# Altium PCB Backplane.PcbDoc
Units mil, origin at the board's own origin, x right, y up, seen from the top; angles counter-clockwise.
Board outline 3937.01 x 9055.12 mil, 4 copper layers (Top Layer, Int1 (GND), Int2 (PWR), Bottom Layer), stack 60.709 mil thick; 33 components, 74 nets, 330 pads, 6 vias.
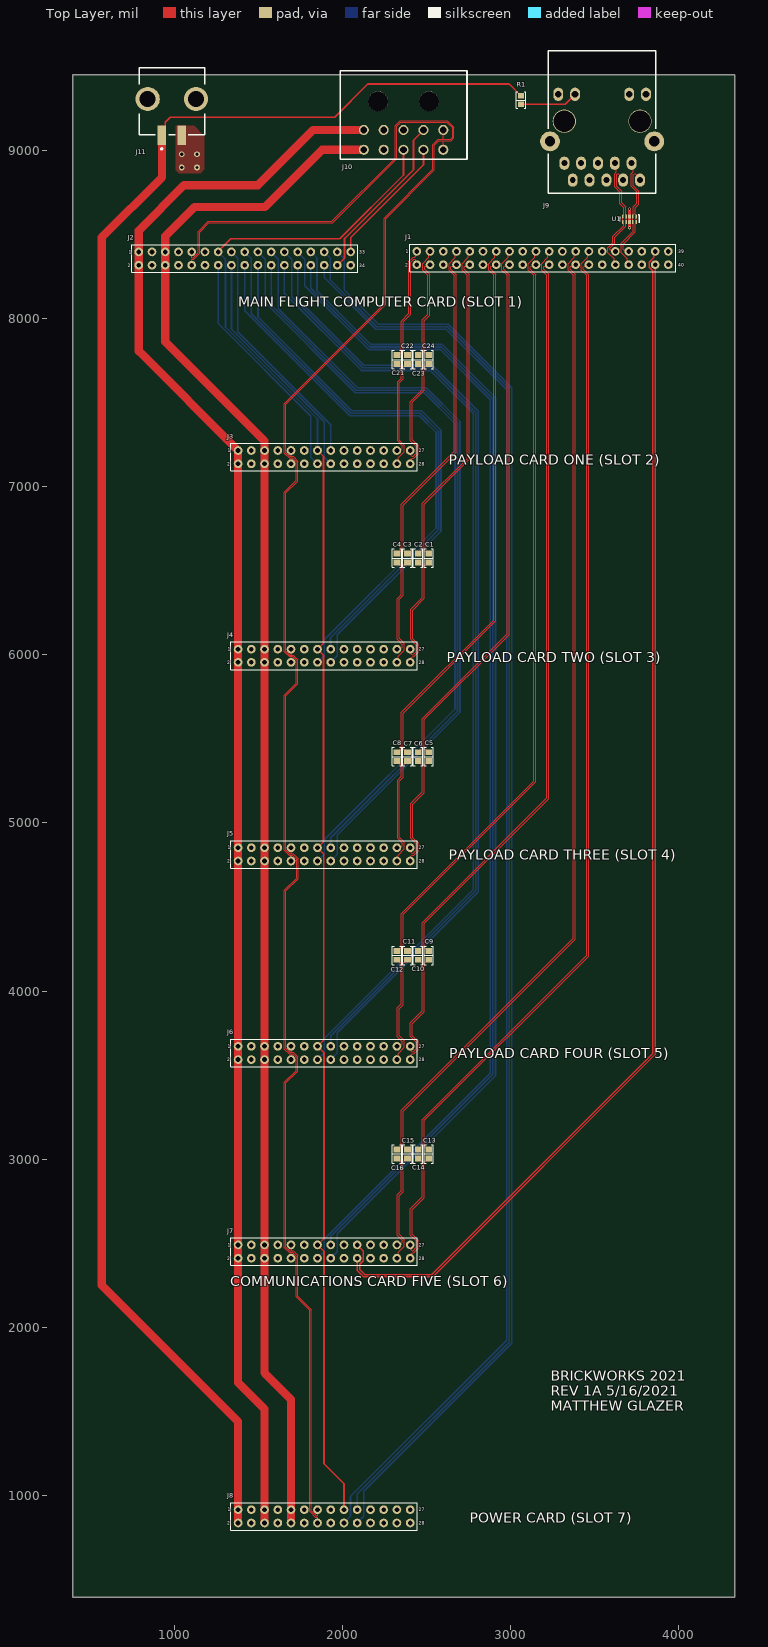
[diagram p0: Top Layer view]
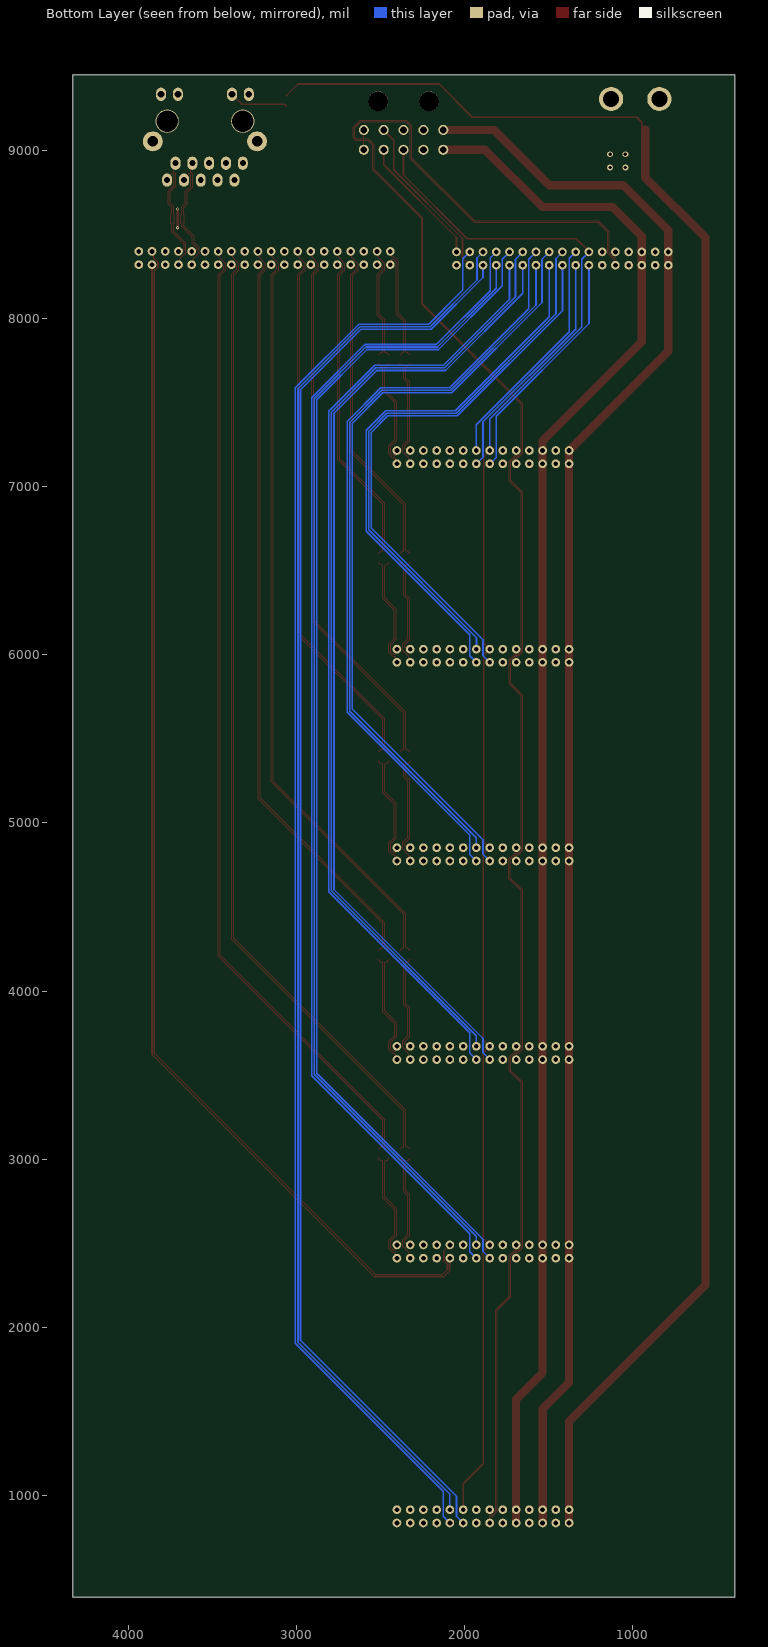
[diagram p1: Bottom Layer view, seen from below]
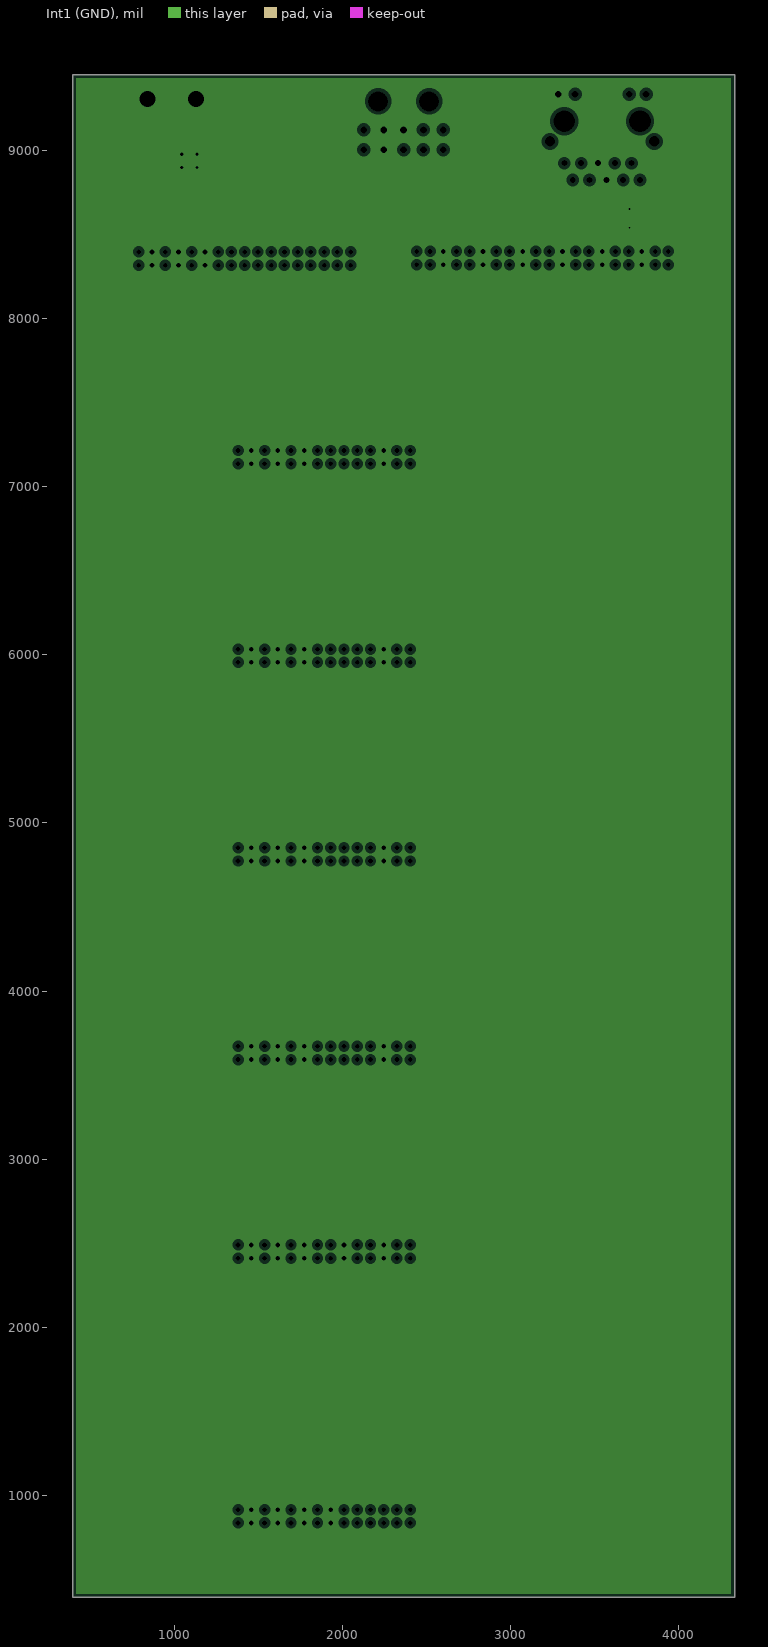
[diagram p2: Int1 (GND), clearances drawn from the general rule]
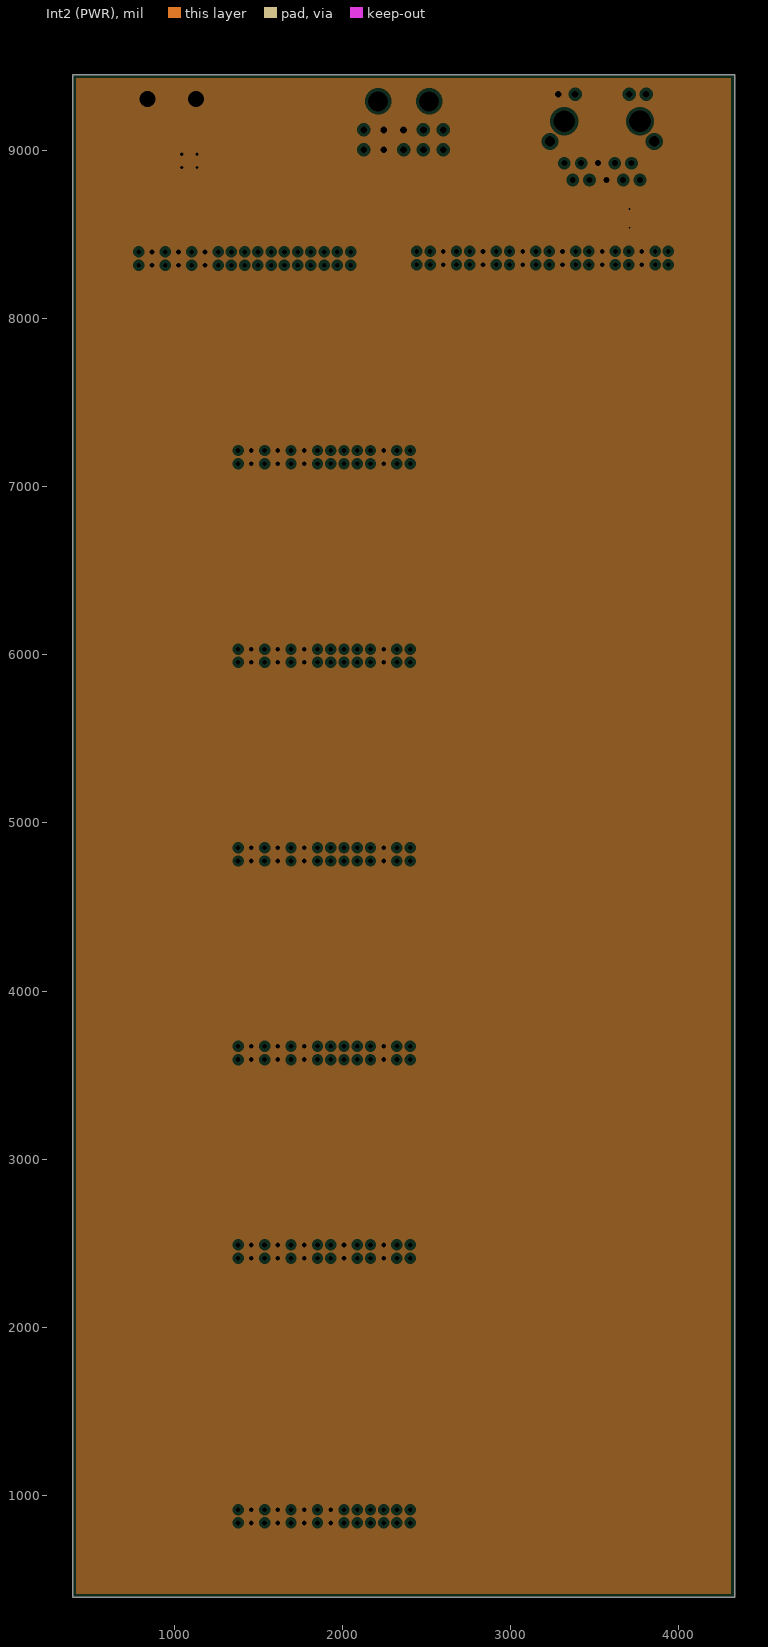
[diagram p3: Int2 (PWR), clearances drawn from the general rule]
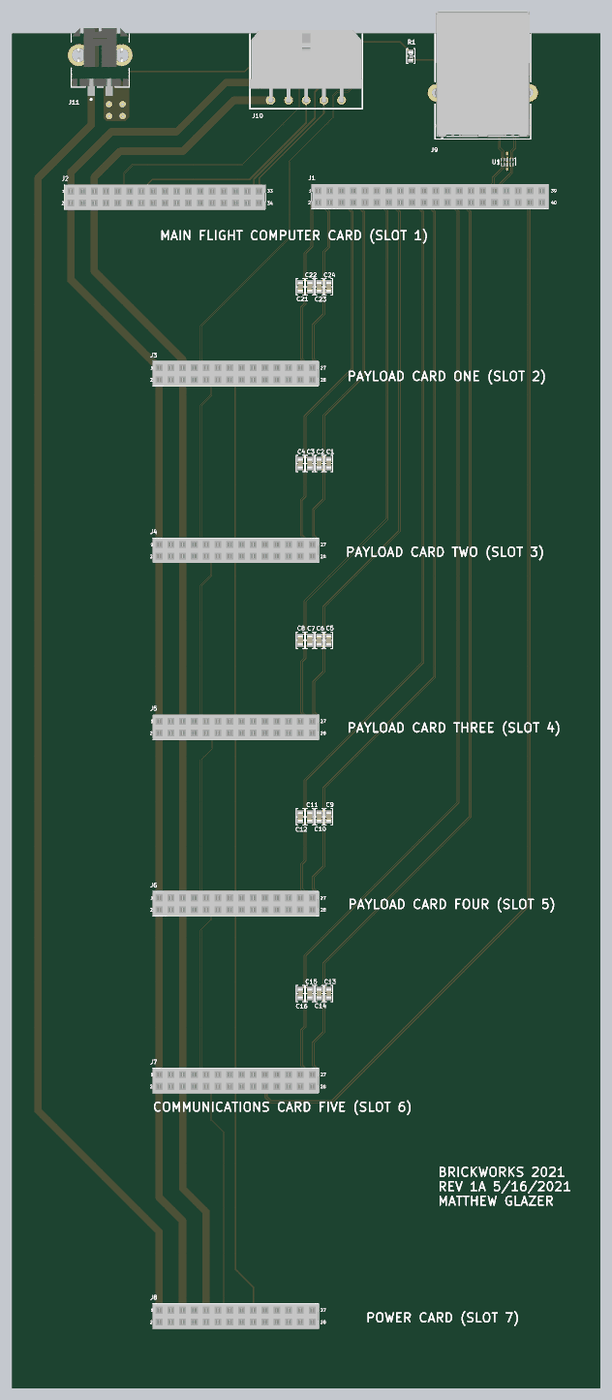
[diagram p4: 3D render of the assembled board from above, using the file's embedded part models]

## Layer stack, top to bottom
Top Solder: solder mask 0.3937, SM-001, Dk 4
Top Layer: signal copper 1.6142
Dielectric 1: prepreg 9.0551, PP-018, Dk 4.3
Int1 (GND): plane copper 1.378, net GND
Dielectric 3: core 36.6142, Core-028, Dk 4.3
Int2 (PWR): plane copper 1.378, net GND
Dielectric 5: prepreg 9.0551, PP-018, Dk 4.3
Bottom Layer: signal copper 1.6142
Bottom Solder: solder mask 0.3937, SM-001, Dk 4

## Board outline
393.7,393.7 393.7,9448.82 4330.71,9448.82 4330.71,393.7

## Design rules (kind name [scope] priority, off if disabled: settings)
Clearance [All] p1: gap=5 ignorepadtopadclearanceinfootprint=FALSE
DiffPairsRouting DiffPairsRouting120ohms [InDifferentialPairClass('DIFF120')] p1: maxlimit=5 minlimit=5 mostfreqgap=5 toplayer_minwidth=3.39 toplayer_maxwidth=3.39 toplayer_prefwidth=3.39 bottomlayer_minwidth=3.39 bottomlayer_maxwidth=3.39 bottomlayer_prefwidth=3.39 impedanceprofiledriven=TRUE impedanceprofileid={4BAA9A4F-C1FF-4DA5-899A-7868F848BEEB} impedanceprofilevalue=120.000000 maxuncoupledlength=500
DiffPairsRouting DiffPairsRouting90ohms [InDifferentialPairClass('DIFF90')] p2: maxlimit=5 minlimit=5 mostfreqgap=5 toplayer_minwidth=9.35 toplayer_maxwidth=9.35 toplayer_prefwidth=9.35 bottomlayer_minwidth=9.35 bottomlayer_maxwidth=9.35 bottomlayer_prefwidth=9.35 impedanceprofiledriven=TRUE impedanceprofileid={3F5B0224-8275-4148-A585-62029B990C27} impedanceprofilevalue=90.000000 maxuncoupledlength=500
DiffPairsRouting DiffPairsRouting100ohms [InDifferentialPairClass('DIFF100')] p3: maxlimit=5 minlimit=5 mostfreqgap=5 toplayer_minwidth=6.71 toplayer_maxwidth=6.71 toplayer_prefwidth=6.71 bottomlayer_minwidth=6.71 bottomlayer_maxwidth=6.71 bottomlayer_prefwidth=6.71 impedanceprofiledriven=TRUE impedanceprofileid={AE841F67-F670-4D4D-929D-F361617AC99B} impedanceprofilevalue=100.000000 maxuncoupledlength=500
HoleSize [All] p1: absolutevalues=TRUE maxlimit=201.57 minlimit=10 maxpercent=80.000 minpercent=20.000
MatchedLengths MatchLengths_J1_Passives_J7 [InxSignalClass('xSignals_J1_Passives_J7_MatchLengthsClass')] p1: tolerance=100 checknetsindiffpair=FALSE checkdiffpairvsdiffpair=TRUE checkxsignals=TRUE checkothers=TRUE
MatchedLengths MatchLengths_xSignals_J1_Passives_6 [InxSignalClass('xSignals_J1_Passives_MatchLengthsClass_6')] p2: tolerance=100 checknetsindiffpair=FALSE checkdiffpairvsdiffpair=TRUE checkxsignals=TRUE checkothers=TRUE
MatchedLengths MatchLengths_xSignals_J1_J7 [InxSignalClass('xSignals_J1_J7_MatchLengthsClass')] p3: tolerance=100 checknetsindiffpair=FALSE checkdiffpairvsdiffpair=TRUE checkxsignals=TRUE checkothers=TRUE
MatchedLengths MatchLengths_J1_Passives_J6 [InxSignalClass('xSignals_J1_Passives_J6_MatchLengthsClass')] p4: tolerance=100 checknetsindiffpair=FALSE checkdiffpairvsdiffpair=TRUE checkxsignals=TRUE checkothers=TRUE
MatchedLengths MatchLengths_xSignals_J1_Passives_5 [InxSignalClass('xSignals_J1_Passives_MatchLengthsClass_5')] p5: tolerance=100 checknetsindiffpair=FALSE checkdiffpairvsdiffpair=TRUE checkxsignals=TRUE checkothers=TRUE
MatchedLengths MatchLengths_xSignals_J1_J6 [InxSignalClass('xSignals_J1_J6_MatchLengthsClass')] p6: tolerance=100 checknetsindiffpair=FALSE checkdiffpairvsdiffpair=TRUE checkxsignals=TRUE checkothers=TRUE
MatchedLengths MatchLengths_J1_Passives_J5 [InxSignalClass('xSignals_J1_Passives_J5_MatchLengthsClass')] p7: tolerance=100 checknetsindiffpair=FALSE checkdiffpairvsdiffpair=TRUE checkxsignals=TRUE checkothers=TRUE
MatchedLengths MatchLengths_xSignals_J1_Passives_4 [InxSignalClass('xSignals_J1_Passives_MatchLengthsClass_4')] p8: tolerance=100 checknetsindiffpair=FALSE checkdiffpairvsdiffpair=TRUE checkxsignals=TRUE checkothers=TRUE
MatchedLengths MatchLengths_xSignals_J1_J5 [InxSignalClass('xSignals_J1_J5_MatchLengthsClass')] p9: tolerance=100 checknetsindiffpair=FALSE checkdiffpairvsdiffpair=TRUE checkxsignals=TRUE checkothers=TRUE
MatchedLengths MatchLengths_J1_Passives_J4 [InxSignalClass('xSignals_J1_Passives_J4_MatchLengthsClass')] p10: tolerance=100 checknetsindiffpair=FALSE checkdiffpairvsdiffpair=TRUE checkxsignals=TRUE checkothers=TRUE
MatchedLengths MatchLengths_xSignals_J1_Passives_3 [InxSignalClass('xSignals_J1_Passives_MatchLengthsClass_3')] p11: tolerance=100 checknetsindiffpair=FALSE checkdiffpairvsdiffpair=TRUE checkxsignals=TRUE checkothers=TRUE
MatchedLengths MatchLengths_xSignals_J1_J4 [InxSignalClass('xSignals_J1_J4_MatchLengthsClass')] p12: tolerance=100 checknetsindiffpair=FALSE checkdiffpairvsdiffpair=TRUE checkxsignals=TRUE checkothers=TRUE
MatchedLengths MatchLengths_J1_Passives_J3_2 [InxSignalClass('xSignals_J1_Passives_J3_MatchLengthsClass_2')] p13: tolerance=100 checknetsindiffpair=FALSE checkdiffpairvsdiffpair=TRUE checkxsignals=TRUE checkothers=TRUE
MatchedLengths MatchLengths_xSignals_J1_Passives_2 [InxSignalClass('xSignals_J1_Passives_MatchLengthsClass_2')] p14: tolerance=100 checknetsindiffpair=FALSE checkdiffpairvsdiffpair=TRUE checkxsignals=TRUE checkothers=TRUE
MatchedLengths MatchLengths_xSignals_J1_J3_2 [InxSignalClass('xSignals_J1_J3_MatchLengthsClass_1')] p15: tolerance=100 checknetsindiffpair=FALSE checkdiffpairvsdiffpair=TRUE checkxsignals=TRUE checkothers=TRUE
MatchedLengths MatchLengths_J1_Passives_J3_1 [InxSignalClass('xSignals_J1_Passives_J3_MatchLengthsClass_1')] p16: tolerance=100 checknetsindiffpair=FALSE checkdiffpairvsdiffpair=TRUE checkxsignals=TRUE checkothers=TRUE
MatchedLengths MatchLengths_xSignals_J1_Passives_1 [InxSignalClass('xSignals_J1_Passives_MatchLengthsClass_1')] p17: tolerance=100 checknetsindiffpair=FALSE checkdiffpairvsdiffpair=TRUE checkxsignals=TRUE checkothers=TRUE
MatchedLengths MatchLengths_J1_Passives_J3 [InxSignalClass('xSignals_J1_Passives_J3_MatchLengthsClass')] p18: tolerance=100 checknetsindiffpair=FALSE checkdiffpairvsdiffpair=TRUE checkxsignals=TRUE checkothers=TRUE
MatchedLengths MatchLengths_xSignals_J1_Passives [InxSignalClass('xSignals_J1_Passives_MatchLengthsClass')] p19: tolerance=100 checknetsindiffpair=FALSE checkdiffpairvsdiffpair=TRUE checkxsignals=TRUE checkothers=TRUE
MatchedLengths MatchLengths_xSignals_J1_J3_1 [InxSignalClass('xSignals_J1_J3_MatchLengthsClass')] p20: tolerance=100 checknetsindiffpair=FALSE checkdiffpairvsdiffpair=TRUE checkxsignals=TRUE checkothers=TRUE
MatchedLengths MatchLengths_xSignals_J1_J3 [InxSignalClass('xSignals_J1_J3_MatchLengthsClass')] p21: tolerance=100 checknetsindiffpair=FALSE checkdiffpairvsdiffpair=TRUE checkxsignals=TRUE checkothers=TRUE
MinimumAnnularRing [All] p1: minimumring=4
MinimumSolderMaskSliver [All] p1: minsoldermaskwidth=3
PlaneClearance [All] p1: clearance=20
PlaneConnect [All] p1: planeconnectstyle=Relief reliefexpansion=20 reliefentries=4 reliefconductorwidth=10 reliefairgap=10
PolygonConnect PolygonConnect_1 [All vs IsNamedPolygon('GND_L01_P002')] p1: connectstyle=Direct reliefconductorwidth=10 reliefentries=4 polygonreliefangle="90 Angle" airgapwidth=10
PolygonConnect [All] p2: connectstyle=Relief reliefconductorwidth=10 reliefentries=4 polygonreliefangle="90 Angle" airgapwidth=10
RoutingVias [All] p1: holewidth=20 width=35 viastyle="Through Hole" minholewidth=10 minwidth=18 maxholewidth=35 maxwidth=50
SilkToSilkClearance [All] p1: silktosilkclearance=5
SilkToSolderMaskClearance [IsPad] p1: minsilkscreentomaskgap=3 clearancetoexposedcopper=TRUE
SolderMaskExpansion [All] p1: expansion=4
Width [All] p1: maxlimit=49.21 minlimit=5 preferedwidth=10
23 further rules are at their usual default settings.

## Classes and differential pairs
differential pair class DIFF120: CAN
differential pair class DIFF100: ETH1_RX ETH1_TX ETH2_RX ETH2_TX ETH3_RX ETH3_TX ETH4_RX ETH4_TX ETH5_RX ETH5_TX ETH6_RX ETH6_TX P_ETH1_RX P_ETH1_TX P_ETH2_RX P_ETH2_TX P_ETH3_RX P_ETH3_TX P_ETH4_RX P_ETH4_TX P_ETH5_RX P_ETH5_TX P_ETH6_RX P_ETH6_TX S_ETH2_RX S_ETH2_TX S_ETH3_RX S_ETH3_TX S_ETH4_RX S_ETH4_TX S_ETH5_RX S_ETH5_TX S_ETH6_RX S_ETH6_TX
differential pair class DIFF90: USB1_D
differential pair S_ETH6_TX: +S_ETH6_TX_P -S_ETH6_TX_N
differential pair S_ETH6_RX: +S_ETH6_RX_P -S_ETH6_RX_N
differential pair S_ETH5_TX: +S_ETH5_TX_P -S_ETH5_TX_N
differential pair S_ETH5_RX: +S_ETH5_RX_P -S_ETH5_RX_N
differential pair S_ETH4_TX: +S_ETH4_TX_P -S_ETH4_TX_N
differential pair S_ETH4_RX: +S_ETH4_RX_P -S_ETH4_RX_N
differential pair S_ETH3_TX: +S_ETH3_TX_P -S_ETH3_TX_N
differential pair S_ETH3_RX: +S_ETH3_RX_P -S_ETH3_RX_N
differential pair P_ETH6_TX: +P_ETH6_TX_P -P_ETH6_TX_N
differential pair P_ETH6_RX: +P_ETH6_RX_P -P_ETH6_RX_N
differential pair P_ETH5_TX: +P_ETH5_TX_P -P_ETH5_TX_N
differential pair P_ETH5_RX: +P_ETH5_RX_P -P_ETH5_RX_N
differential pair P_ETH4_TX: +P_ETH4_TX_P -P_ETH4_TX_N
differential pair P_ETH4_RX: +P_ETH4_RX_P -P_ETH4_RX_N
differential pair P_ETH3_TX: +P_ETH3_TX_P -P_ETH3_TX_N
differential pair P_ETH3_RX: +P_ETH3_RX_P -P_ETH3_RX_N
differential pair P_ETH1_TX: +P_ETH1_TX_P -P_ETH1_TX_N
differential pair P_ETH1_RX: +P_ETH1_RX_P -P_ETH1_RX_N
differential pair S_ETH2_TX: +S_ETH2_TX_P -S_ETH2_TX_N
differential pair S_ETH2_RX: +S_ETH2_RX_P -S_ETH2_RX_N
differential pair P_ETH2_TX: +P_ETH2_TX_P -P_ETH2_TX_N
differential pair P_ETH2_RX: +P_ETH2_RX_P -P_ETH2_RX_N
differential pair CAN: +CAN_P -CAN_N
differential pair USB1_D: +USB1_D_P -USB1_D_N

## Components (designator, comment, footprint, x,y, rotation, side; value= is the part's Value field where it differs from the comment)
C1 "0.033µF" "CAP 0603_1608" 2511.81,6574.8 r90 top
C2 "0.033µF" "CAP 0603_1608" 2448.82,6574.8 r90 top
C3 "0.033µF" "CAP 0603_1608" 2385.83,6574.8 r90 top
C4 "0.033µF" "CAP 0603_1608" 2322.83,6574.8 r90 top
C5 "0.033µF" "CAP 0603_1608" 2511.81,5393.7 r90 top
C6 "0.033µF" "CAP 0603_1608" 2448.82,5393.7 r90 top
C7 "0.033µF" "CAP 0603_1608" 2385.83,5393.7 r90 top
C8 "0.033µF" "CAP 0603_1608" 2322.83,5393.7 r90 top
C9 "0.033µF" "CAP 0603_1608" 2511.81,4212.6 r90 top
C10 "0.033µF" "CAP 0603_1608" 2448.82,4212.6 r90 top
C11 "0.033µF" "CAP 0603_1608" 2385.83,4212.6 r90 top
C12 "0.033µF" "CAP 0603_1608" 2322.83,4212.6 r90 top
C13 "0.033µF" "CAP 0603_1608" 2511.81,3031.5 r90 top
C14 "0.033µF" "CAP 0603_1608" 2448.82,3031.5 r90 top
C15 "0.033µF" "CAP 0603_1608" 2385.83,3031.5 r90 top
C16 "0.033µF" "CAP 0603_1608" 2322.83,3031.5 r90 top
C21 "0.033µF" "CAP 0603_1608" 2322.83,7755.91 r90 top
C22 "0.033µF" "CAP 0603_1608" 2385.83,7755.91 r90 top
C23 "0.033µF" "CAP 0603_1608" 2448.82,7755.91 r90 top
C24 "0.033µF" "CAP 0603_1608" 2511.81,7755.91 r90 top
J1 "0791077019" 0791077019 2440.94,8398.74 r0 top
J2 "0791077016" 0791077016 787.4,8395.67 r0 top
J3 "0791077013" 0791077013 1377.95,7214.57 r0 top
J4 "0791077013" 0791077013 1377.95,6033.46 r0 top
J5 "0791077013" 0791077013 1377.95,4852.36 r0 top
J6 "0791077013" 0791077013 1377.95,3671.26 r0 top
J7 "0791077013" 0791077013 1377.95,2490.16 r0 top
J8 "0791077013" 0791077013 1377.95,915.35 r0 top
J9 "SCH - CONNECTOR - ETHERNET - ABRACON ARJM11" "PCB - CONNECTOR - MODULAR - ETHERNET - ABRACON ARJM11" 3543.31,9173.23 r180 top
J10 "SCH - CONNECTOR - RECTANGULAR - MOLEX 0430451000" "PCB - CONNECTOR - RECTANGULAR - MOLEX 0430451000" 2362.2,9291.34 r180 top
J11 "436500210" FP-436500210-MFG 984.25,9291.34 r180 top
R1 "1 kOhms" "RES 0603_1608" 3061.02,9299.21 r90 top
U1 "TPD4S010DQAR" DQA0010A_V 3706,8590 r270 top

## Footprints (in the part's own frame and the unit in brackets; to place one, negate y for a bottom-side part, rotate by r counter-clockwise, add the part's x,y. Pads: shape width x height; smd on the part's side, far side on the other; paste and mask are expansions set on the pad)
0791077013 [mm] "28 pin milli-grid receptacle, vertical"
  round 1.31 hole 0.71: 1(0,0) 2(0,-2) 3(2,0) 4(2,-2) 5(4,0) 6(4,-2) 7(6,0) 8(6,-2) 9(8,0) 10(8,-2) 11(10,0) 12(10,-2) 13(12,0) 14(12,-2) 15(14,0) 16(14,-2) 17(16,0) 18(16,-2) 19(18,0) 20(18,-2) 21(20,0) 22(20,-2) 23(22,0) 24(22,-2) 25(24,0) 26(24,-2) 27(26,0) 28(26,-2)
  silkscreen extent -1.09,-3.09 27.09,1.09, body extent -1.09,-3.09 27.1,1.1, height 4.47
0791077016 [mm] "34 pin milli-grid receptacle, vertical"
  round 1.31 hole 0.71: 1(0,0) 2(0,-2) 3(2,0) 4(2,-2) 5(4,0) 6(4,-2) 7(6,0) 8(6,-2) 9(8,0) 10(8,-2) 11(10,0) 12(10,-2) 13(12,0) 14(12,-2) 15(14,0) 16(14,-2) 17(16,0) 18(16,-2) 19(18,0) 20(18,-2) 21(20,0) 22(20,-2) 23(22,0) 24(22,-2) 25(24,0) 26(24,-2) 27(26,0) 28(26,-2) 29(28,0) 30(28,-2) 31(30,0) 32(30,-2) 33(32,0) 34(32,-2)
  silkscreen extent -1.09,-3.09 33.09,1.09, body extent -1.09,-3.09 33.1,1.1, height 4.47
0791077019 [mm] "40 pin milli-grid receptacle, vertical"
  round 1.31 hole 0.71: 1(0,0) 2(0,-2) 3(2,0) 4(2,-2) 5(4,0) 6(4,-2) 7(6,0) 8(6,-2) 9(8,0) 10(8,-2) 11(10,0) 12(10,-2) 13(12,0) 14(12,-2) 15(14,0) 16(14,-2) 17(16,0) 18(16,-2) 19(18,0) 20(18,-2) 21(20,0) 22(20,-2) 23(22,0) 24(22,-2) 25(24,0) 26(24,-2) 27(26,0) 28(26,-2) 29(28,0) 30(28,-2) 31(30,0) 32(30,-2) 33(32,0) 34(32,-2) 35(34,0) 36(34,-2) 37(36,0) 38(36,-2) 39(38,0) 40(38,-2)
  silkscreen extent -1.09,-3.09 39.09,1.09, body extent -1.1,-3.1 39.09,1.09, height 4.47
"CAP 0603_1608" [mm] "Chip Capacitor, 2-Leads, Body 1.60x0.80mm, IPC Medium Density"
  rect 0.9x1 smd: 1(-0.675,0) 2(0.675,0)
  silkscreen extent -1.4,-0.7 1.4,0.7, body extent -0.8,-0.41 0.8,0.41, height 0.82
DQA0010A_V [mm] "SON, 10-Leads, Body 1x2.5mm, Pitch 0.5mm, TI Recommended"
  rrect50% 0.565x0.2 smd: 1(-0.417,1) 2(-0.417,0.5) 4(-0.417,-0.5) 5(-0.417,-1) 6(0.417,-1) 7(0.417,-0.5) 9(0.417,0.5) 10(0.417,1)
  rrect28% 0.565x0.36 on Top Paste: 3(-0.417,0) 8(0.417,0)
  rrect25% 0.565x0.4 smd paste-0.2: 3(-0.417,0) 8(0.417,0)
  silkscreen extent -0.67,-1.45 0.55,1.45, body extent -0.55,-1.3 0.55,1.3, height 0.56
FP-436500210-MFG [mm]
  rect 1.27x2.92 smd paste+0 mask+0: 1(1.5,5.12) 2(-1.5,5.12)
  round 3.66 hole 2.41 paste-1000 mask+0: 3(-3.65,-0.35) 4(3.65,-0.35)
  silkscreen extent -4.95,-5.07 4.95,7.3, body extent -5.58,-5.18 5.58,6.68, height 0.25
"PCB - CONNECTOR - MODULAR - ETHERNET - ABRACON ARJM11" [mm]
  oval 1.5x2 hole 0.9: 1(-5.715,8.89) 2(-4.445,6.35) 3(-3.175,8.89) 4(-1.905,6.35) 5(-0.635,8.89) 6(0.635,6.35) 7(1.905,8.89) 8(3.175,6.35) 9(4.445,8.89) 10(5.715,6.35)
  oval 1.5x2 hole 1.02: 11(-6.63,-4.06) 12(-4.09,-4.06) 13(4.09,-4.06) 14(6.63,-4.06)
  round 3.5 hole 3.25: M(-5.715,0) M(5.715,0)
  round 3 hole 1.57: S(-7.875,3.05) S(7.875,3.05)
  silkscreen extent -8.13,-10.67 8.13,10.92, body extent -8.1,-10.75 8.1,10.85, height 13.2
"PCB - CONNECTOR - RECTANGULAR - MOLEX 0430451000" [mm]
  round 1.524 hole 1.02: 1(6,4.32) 2(3,4.32) 3(0,4.32) 4(-3,4.32) 5(-6,4.32) 6(6,7.32) 7(3,7.32) 8(0,7.32) 9(-3,7.32) 10(-6,7.32)
  round 3 hole 3: M(-3.85,0) M(3.85,0)
  silkscreen extent -9.57,-4.6 9.58,8.76, body extent -9.57,-4.6 9.58,7.64, height 8.83
"RES 0603_1608" [mm] "Chip Resistor, 2-Leads, Body 1.60x0.80mm, IPC Medium Density"
  rect 0.85x0.95 smd: 1(-0.65,0) 2(0.65,0)
  silkscreen extent -1.27,-0.7 1.27,0.7, body extent -0.8,-0.4 0.8,0.4, height 0.45

## Part data
C1 C2 C3 C4 C5 C6 C7 C8 C9 C10 C11 C12 C13 C14 C15 C16 C21 C22 C23 C24: library part CL10B333KB8NFNC, "CAP CER 0.033UF 50V X7R 0603", Device Package="0603 (1608 Metric)", Manufacturer="Samsung Electro-Mechanics", Operating Temperature="-55°C ~ 125°C", Supplier Part Number 1=1276-2040-1-ND, Temperature Coefficient=X7R, Tolerance=±10%, Applications="General Purpose", Capacitance=0.033µF, ComponentLink1Description=Datasheet, ComponentLink1URL=http://www.samsungsem.com/kr/support/product-search/mlcc/CL10B333KB8NFNC.jsp, ComponentLink2Description="DigiKey Link", ComponentLink2URL=http://digikey.com/product-detail/en/samsung-electro-mechanics/CL10B333KB8NFNC/1276-2040-1-ND/3890126, LastUpdated="8/13/2020 10:21:44 AM", Lifecycle Status=Active, Minimum Order=1, Mounting Type="Surface Mount, MLCC", Package / Case="0603 (1608 Metric)", Packaging=TapeAndReel, PartId=14254, Part Number=CL10B333KB8NFNC, Part Status=Active, Price=0.01, Series=CL, Size / Dimension="0.063\" L x 0.031\" W (1.60mm x 0.80mm)", Supplier 1=DigiKey, Thickness (Max)="0.035\" (0.90mm)"
J1: Supplier Part Number 1=WM18685-ND, Supplier 1=Digi-Key
J2: Supplier Part Number 1=WM4228-ND, Supplier 1=Digi-Key
J3 J4 J5 J6 J7 J8: Supplier Part Number 1=23-0791077013-ND, Supplier 1=Digi-Key
J9: Supplier Part Number 1=535-14133-1-ND, Supplier 1=Digi-Key
J10: Supplier Part Number 1=WM1817-ND, Supplier 1=Digi-Key
J11: library part CMP-04776-000082-1, "CONN HEADER SMD R/A 2POS 3MM", Current Rating=8.5A, Manufacturer=Molex, Temperature="-40°C to +105°C", Temperature Range High=+105°C, Temperature Range Low=-40°C, Voltage Rating=600V, Automotive=No, Category=Conn, ComponentLink2Description=Datasheet, ComponentLink2URL=https://www.molex.com/webdocs/datasheets/pdf/en-us/0436500210_PCB_HEADERS.pdf, Conn Gender=Male, Conn Orientation="Right Angle", Contact Material=Gold,Nickel, Device Class L1=Connectors, Device Class L2="Headers and Wire Housings", Device Class L3=unset, Digikey Description="CONN HEADER SMD R/A 2POS 3MM", Footprint Url=https://www.molex.com/pdm_docs/sd/436500210_sd.pdf, Height=6.07mm, Lead Free=Yes, Manufacturer Part Number=436500210, Mouser Description="Conn Power HDR 2 POS 3mm Solder RA SMD 2 Terminal 1 Port Embossed T/R", Number of Contacts=2, Number of Rows=1, Octopart=https://octopart.com/43650-0210-molex-298097, Package=436500210, Pitch=3mm, RoHS=TRUE
R1: library part RNCP0603FTD1K00, "RES 1K OHM 1% 1/8W 0603", Device Package="0603 (1608 Metric)", Manufacturer="Stackpole Electronics Inc", Operating Temperature="-55°C ~ 155°C", Power (Watts)="0.125W, 1/8W", Supplier Device Package=0603, Supplier Part Number 1=RNCP0603FTD1K00CT-ND, Temperature Coefficient=±100ppm/°C, Tolerance=±1%, ComponentLink1Description=Datasheet, ComponentLink1URL=https://www.seielect.com/catalog/sei-rncp.pdf, ComponentLink2Description="DigiKey Link", ComponentLink2URL=http://digikey.com/product-detail/en/stackpole-electronics-inc/RNCP0603FTD1K00/RNCP0603FTD1K00CT-ND/2240445, Composition="Thin Film", Features="Anti-Sulfur, Moisture Resistant", Height - Seated (Max)="0.020\" (0.50mm)", LastUpdated="9/2/2020 1:10:23 AM", Lifecycle Status=Active, Minimum Order=1, Number of Terminations=2, Package / Case="0603 (1608 Metric)", Packaging=TapeAndReel, PartId=5694, Part Number=RNCP0603FTD1K00, Part Status=Active, Price=0.01, Resistance="1 kOhms", Series=RNCP, Size / Dimension="0.059\" L x 0.031\" W (1.50mm x 0.80mm)", Supplier 1=DigiKey
U1: library part CMP-0326-00026-3, "ESD Solution for High-Speed Differential Interface, 4 Channels, -40 to +85 degC,10-pin SON (DQA), Green (RoHS & no Sb/Br)", Breakdown Voltage(Min)(V)=9, Differential Capacitance(pF)=0.05, IO Capacitance(Typ)(pF)=0.8, IO Leakage Current(nA)=10, Manufacturer="Texas Instruments", 1394 / Firewire=TRUE, ComponentLink1Description="Manufacturer URL", ComponentLink1URL=http://www.ti.com/, ComponentLink2Description=Datasheet, ComponentLink2URL=http://www.ti.com/general/docs/lit/getliterature.tsp?genericPartNumber=TPD4S010&fileType=pdf, ComponentLink3Description="URL Link1", ComponentLink3URL=SamplesURL:http://www.ti.com/product/tpd4s010#samples, DatasheetVersion=SLVS817E, Eco-Plan="Green (RoHS & no Sb/Br)", IEC 61000-4-2 Air-Gap(+/- kV)=9, IEC 61000-4-2 Contact(+/- kV)=8, Mounting Technology="Surface Mount", PackageDescription="10-Pin Plastic Small Outline No-Lead, 1 x 2.5 x 0.55 mm Body, 0.5 mm Pitch", PackageReference=DQA0010A, PackageVersion="revB, Sep-2009", PartNumber=TPD4S010DQAR, Serial ATA / eSATA=TRUE, SubFamily="ESD Solution"

## Via types
v1: diameter 35, hole 20, Top Layer to Bottom Layer, 4 vias
v2: diameter 18, hole 10, Top Layer to Bottom Layer, 2 vias

## Nets (pads, with @x,y where several pads share a name; then routed paths per layer and width w, separated by ;. In a path a pad name is that pad's centre, name@x,y a point inside that pad or via, vN(x,y) a via of type N, cw(c..) or ccw(c..) an arc to the next point about the centre after c; other vN are vias at no path point)
CAN_N: J2.10 J3.10 J4.10 J5.10 J6.10 J7.10 J8.14 J10.5 | length 11488.2
  Top Layer w3.39: J2.10 1102.36,8350.11 1104.35,8352.1 1114.33,8352.1 1148.62,8386.39 1148.62,8512.75 1204.87,8569 1940,8569 2321,8950 2321,9142 2346,9167 2620,9167 2653.61,9133.39 2653.61,9077.48 2642.53,9066.4 2600.41,9066.4 2598.43,9068.39 ; J7.10 1692.91,2444.6 ; J6.10 1692.91,3625.7 ; J5.10 1692.91,4806.81 ; J4.10 1692.91,5987.91 ; J3.10 1692.91,7169.01 ; J8.14 1850.39,869.8 1848.41,871.79 1838.42,871.79 1804.14,906.07 1804.14,2101.86 1723.79,2182.21 1723.79,2424.21 1701.41,2446.59 1694.9,2446.59 1692.91,2444.6 ; J10.5 2598.43,9068.39 ; 1692.91,2444.6 1690.93,2446.59 1680.94,2446.59 1653.64,2473.89 1653.64,3456.64 1723.79,3526.79 1723.79,3605.31 1701.41,3627.69 1694.9,3627.69 1692.91,3625.7 ; 1692.91,3625.7 1690.93,3627.69 1680.94,3627.69 1653.64,3654.99 1653.64,4598.51 1727.06,4671.94 1727.06,4783.14 1701.41,4808.8 1694.9,4808.8 1692.91,4806.81 ; 1692.91,4806.81 1690.93,4808.8 1680.94,4808.8 1653.64,4836.1 1653.64,5760.51 1723.79,5830.66 1723.79,5967.51 1701.41,5989.9 1694.9,5989.9 1692.91,5987.91 ; 1692.91,5987.91 1690.93,5989.9 1680.94,5989.9 1653.64,6017.2 1653.64,6966.51 1723.79,7036.66 1723.79,7148.62 1701.41,7171 1694.9,7171 1692.91,7169.01 ; 1692.91,7169.01 1690.93,7171 1680.94,7171 1653.64,7198.3 1653.64,7494.04 2247,8087.39 2247,8597 2537,8887 2537,9034 2569.4,9066.4 2596.44,9066.4 2598.43,9068.39
CAN_P: J2.9 J3.9 J4.9 J5.9 J6.9 J7.9 J8.13 J10.10 | length 11488.2
  Top Layer w3.39: J2.9 1102.36,8362.48 1104.35,8360.5 1110.86,8360.5 1140.22,8389.86 1140.22,8516.22 1201.39,8577.39 1936.52,8577.39 2312.61,8953.48 2312.61,9145.48 2342.52,9175.39 2623.48,9175.39 2662,9136.87 2662,9074 2646.01,9058.01 2600.41,9058.01 2598.43,9056.02 ; J7.9 1692.91,2456.97 ; J6.9 1692.91,3638.07 ; J5.9 1692.91,4819.18 ; J4.9 1692.91,6000.28 ; J3.9 1692.91,7181.38 ; J8.13 1850.39,882.17 1848.41,880.18 1841.9,880.18 1812.53,909.55 1812.53,2105.34 1732.19,2185.69 1732.19,2427.68 1704.88,2454.98 1694.9,2454.98 1692.91,2456.97 ; J10.10 2598.43,9056.02 ; 1692.91,2456.97 1690.93,2454.98 1684.42,2454.98 1662.04,2477.37 1662.04,3453.16 1732.19,3523.31 1732.19,3608.79 1704.88,3636.09 1694.9,3636.09 1692.91,3638.07 ; 1692.91,3638.07 1690.93,3636.09 1684.42,3636.09 1662.04,3658.47 1662.04,4595.04 1735.46,4668.46 1735.46,4786.62 1704.88,4817.19 1694.9,4817.19 1692.91,4819.18 ; 1692.91,4819.18 1690.93,4817.19 1684.42,4817.19 1662.04,4839.57 1662.04,5757.04 1732.19,5827.19 1732.19,5970.99 1704.88,5998.29 1694.9,5998.29 1692.91,6000.28 ; 1692.91,6000.28 1690.93,5998.29 1684.42,5998.29 1662.04,6020.67 1662.04,6963.04 1732.19,7033.19 1732.19,7152.09 1704.88,7179.39 1694.9,7179.39 1692.91,7181.38 ; 1692.91,7181.38 1690.93,7179.39 1684.42,7179.39 1662.04,7201.78 1662.04,7490.56 2255.39,8083.92 2255.39,8593.52 2545.39,8883.52 2545.39,9030.52 2572.88,9058.01 2596.44,9058.01 2598.43,9056.02
GND: J1.5 J1.6 J1.11 J1.12 J1.17 J1.18 J1.23 J1.24 J1.29 J1.30 J1.35 J1.36 J2.3 J2.4 J2.7 J2.8 J2.11 J2.12 J3.3 J3.4 J3.7 J3.8 J3.11 J3.12 J3.23 J3.24 J4.3 J4.4 J4.7 J4.8 J4.11 J4.12 J4.23 J4.24 J5.3 J5.4 J5.7 J5.8 J5.11 J5.12 J5.23 J5.24 J6.3 J6.4 J6.7 J6.8 J6.11 J6.12 J6.23 J6.24 J7.3 J7.4 J7.7 J7.8 J7.11 J7.12 J7.17 J7.18 J7.23 J7.24 J8.3 J8.4 J8.7 J8.8 J8.11 J8.12 J8.15 J8.16 J9.5 J9.6 J9.14 J10.2 J10.3 J10.7 J11.2 J11.3 J11.4 U1.3@3706,8606.44 U1.8@3706,8573.56 | length 111.7
  Top Layer w9.35: v2(3705.5,8539.5) v2@3705.5,8541.5 ; v2@3705.5,8650.5 v2(3706,8651)
  Top Layer w15.75: v2@3705.5,8541.5 v2@3705.5,8650.5
  other v1: 1043.31,8897.64 1133.86,8897.64 1043.31,8976.38 1133.86,8976.38
NetJ2_1: J2.1 J2.2 J3.1 J3.2 J4.1 J4.2 J5.1 J5.2 J6.1 J6.2 J7.1 J7.2 J8.5 J8.6 J10.1 | length 9582.9
  Top Layer w39.37: J8.6@1535,837.05 J8.6
  Top Layer w49.21: J8.6@1535,837.05 1535,1514 1377.95,1671.05 J7.2 J7.1 J6.2 J6.1 J5.2 J5.1 J4.2 J4.1 J3.2 J3.1 787.4,7805.12 J2.2 J2.1 787.4,8523.4 1057,8793 1496,8793 1824.26,9121.26 J10.1
NetJ2_5: J2.5 J2.6 J3.5 J3.6 J4.5 J4.6 J5.5 J5.6 J6.5 J6.6 J7.5 J7.6 J8.9 J8.10 J10.6 | length 9356.2
  Top Layer w49.21: J8.10 J8.9 1692.91,1572.09 1535.43,1729.57 J7.6 J7.5 J6.6 J6.5 J5.6 J5.5 J4.6 J4.5 J3.6 J3.5 1535.43,7271.57 944.88,7862.12 J2.6 J2.5 944.88,8488.88 1119,8663 1537,8663 1877.15,9003.15 J10.6
NetJ2_13: J2.13 J3.13 J4.13 J5.13 J6.13 J7.13 J8.17 J10.8 | length 9356.3
  Top Layer w10: J2.13 1259.84,8398.84 1335,8474 1983,8474 2362.2,8853.2 J10.8 ; J3.13 1886.18,7178.78 1886.18,6069.25 J4.13 1886.18,5997.68 1886.18,4888.15 J5.13 1888,4814.76 1888,3708.87 J6.13 1889,3632.65 1889,2528.76 J7.13 1889,2451.55 1889,1189 2007.87,1070.13 J8.17
  Bottom Layer w10: J2.13 1302.8,8352.72 1302.8,7949.2 1850.39,7401.61 J3.13
NetJ2_14: J2.14 J3.14 | length 1427
  Bottom Layer w10: J2.14 1259.84,7970.16 1811,7419 1811,7173 1848.17,7135.83 J3.14
NetJ2_15: J2.15 J3.15 | length 1425.7
  Bottom Layer w10: J2.15 1376,8358.25 1376,7921 1929.13,7367.87 J3.15
NetJ2_16: J2.16 J3.16 | length 1425.7
  Bottom Layer w10: J2.16 1338.58,7936.42 1889.59,7385.41 1889.59,7175.37 J3.16
NetJ2_17: J2.17 J4.15 | length 3348.2
  Bottom Layer w10: J2.17 1456,8356.99 1456,8028.79 2048.79,7436 2462.21,7436 2570,7328.21 2570,6744 1928,6102 1928,6034.6 J4.15
NetJ2_18: J2.18 J4.14 | length 3367.5
  Bottom Layer w10: J2.18 1417.32,8046.25 2042.57,7421 2456,7421 2555,7322 2555,6754 1890,6089 1890,5994.33 J4.14
NetJ2_19: J2.19 J5.14 | length 4686
  Bottom Layer w10: J2.19 1539.02,8352.72 1539.02,8094.56 2075.57,7558 2485,7558 2668,7375 2668,5677 1890,4899 1890,4813.23 J5.14
NetJ2_20: J2.20 J4.16 | length 3327.1
  Bottom Layer w10: J2.20 1496.06,8009.94 2055,7451 2468.43,7451 2585,7334.43 2585,6735 1968,6118 1968,5993.59 J4.16
NetJ2_21: J2.21 J5.16 | length 4645.6
  Bottom Layer w10: J2.21 1617.76,8352.72 1617.76,8058.24 2088,7588 2497.43,7588 2698,7387.43 2698,5658 1968,4928 1968,4812.49 J5.16
NetJ2_22: J2.22 J5.15 | length 4475.7
  Bottom Layer w10: J2.22 1574.8,8079.98 2081.79,7573 2491.21,7573 2683,7381.21 2683,5665 1929.13,4911.13 J5.15
NetJ2_23: J2.23 J6.15 | length 5792.6
  Bottom Layer w10: J2.23 1696.5,8352.72 1696.5,8128.29 2118.79,7706 2527.21,7706 2792,7441.21 2792,4598 1929.13,3735.13 J6.15
NetJ2_24: J2.24 J6.14 | length 5812
  Bottom Layer w10: J2.24 1653.54,8150.03 2112.57,7691 2521,7691 2776,7436 2776,4604 1890,3718 1890,3632.13 J6.14
NetJ2_25: J2.25 J7.14 | length 7133.7
  Bottom Layer w10: J2.25 1775.24,8352.72 1775.24,8194.34 2154.57,7815 2580,7815 2878,7517 2878,3512 1890,2524 1890,2451.02 J7.14
NetJ2_26: J2.26 J6.16 | length 5772.4
  Bottom Layer w10: J2.26 1732.28,8113.72 2125,7721 2533.43,7721 2807,7447.43 2807,4590 1968,3751 1968,3631.39 J6.16
NetJ2_27: J2.27 J7.16 | length 7094.1
  Bottom Layer w10: J2.27 1847,8359.69 1847,8165 2167,7845 2592.43,7845 2909,7528.43 2909,3497 1968,2556 1968,2450.28 J7.16
NetJ2_28: J2.28 J7.15 | length 6923.4
  Bottom Layer w10: J2.28 1811.02,8179.76 2160.79,7830 2586.21,7830 2893,7523.21 2893,3505 1929.13,2541.13 J7.15
NetJ2_29: J2.29 J8.19 | length 8555.1
  Bottom Layer w10: J2.29 1925.55,8359.88 1925.55,8228.66 2203.21,7951 2621.21,7951 2990,7582.21 2990,1912 2086.61,1008.61 J8.19
NetJ2_30: J2.30 J8.18 | length 8575.3
  Bottom Layer w10: J2.30 1889.76,8243.24 2197,7936 2615,7936 2975,7576 2975,1924 2047,996 2047,875.74 J8.18
NetJ2_31: J2.31 J8.20 | length 8612.4
  Bottom Layer w10: J2.31 2009.73,8354.44 2009.73,8169.27 2213,7966 2627.43,7966 3006,7587.43 3006,1905 2126,1025 2126,876 J8.20
NetJ2_32: J2.32 J10.4 | length 1016.3
  Top Layer w10: J2.32 2011.46,8359.88 2011.46,8475.46 2421,8885 2421,9060 2480.31,9119.31 J10.4
NetJ2_33: J2.33 J10.9 | length 786.9
  Top Layer w10: J2.33 2047.24,8481.73 2480.31,8914.81 J10.9
NetJ8_1: J8.1 J8.2 J11.1 R1.2 | length 11053.7
  Top Layer w10: J11.1@925.2,9122.24 945.2,9142.24 945.2,9167.2 975,9197 1953,9197 2150,9394 2990,9394 R1.2@3058,9326
  Top Layer w49.21: J11.1@925.2,9122.24 J11.1 925.2,8839.2 567,8481 567,2251 1378,1440 J8.2@1378,841
NetJ9_13: J9.13 R1.1 | length 351.6
  Top Layer w10: R1.1@3058.98,9261.76 R1.1@3070.71,9273.49 ; R1.1@3071.73,9274 3323.21,9274 J9.13
P_ETH1_RX_N: J1.32 J9.4 U1.5 U1.6 | length 694
  Top Layer w6.71: J9.4 3627.58,8913.96 3627.58,8872.06 3617.01,8861.49 3617.01,8782.66 3648.3,8751.37 3648.3,8682.07 3670.62,8659.75 3670.62,8617.61 3666.63,8613.62 U1.5 U1.6 3666.63,8566.38 3670.62,8562.39 3670.62,8551.83 3607.32,8488.53 3607.32,8451.26 3577.45,8421.39 3577.45,8391.88 3614.35,8354.98 3614.35,8327.69 J1.32
P_ETH1_RX_P: J1.31 J9.3 U1.4 U1.7 | length 611.2
  Top Layer w6.71: J1.31 3613.73,8407.06 3593.08,8407.06 3589.15,8410.99 3589.15,8416.54 3619.03,8446.41 3619.03,8483.69 3682.33,8546.98 3682.33,8562.39 3686.32,8566.38 U1.7 U1.4 3686.32,8613.62 3682.33,8617.61 3682.33,8664.6 3660.01,8686.91 3660.01,8756.22 3628.72,8787.5 3628.72,8856.64 3633.95,8861.87 3639.51,8861.87 3668.31,8833.07 J9.3
P_ETH1_TX_N: J1.34 J9.2 U1.2 U1.9 | length 685.6
  Top Layer w6.71: J1.34 3693.09,8327.69 3693.09,8354.98 3656.19,8391.88 3656.19,8446.61 3729.67,8520.1 3729.67,8562.39 3725.69,8566.38 3725.69,8613.62 3729.67,8617.61 3729.67,8664.6 3749.8,8684.73 3749.8,8752.87 3717.01,8785.66 3717.01,8861.49 3727.58,8872.06 3727.58,8913.96 J9.2
P_ETH1_TX_P: J1.33 J9.1 U1.1 U1.10 | length 602.7
  Top Layer w6.71: J1.33 3692.47,8407.06 3671.82,8407.06 3667.89,8410.99 3667.89,8441.76 3741.38,8515.25 3741.38,8562.39 3745.37,8566.38 U1.10 ; U1.10 3745.37,8613.62 3741.38,8617.61 3741.38,8659.75 3761.51,8679.88 3761.51,8757.72 3728.72,8790.51 3728.72,8856.64 3733.95,8861.87 3739.51,8861.87 3768.31,8833.07 J9.1
P_ETH2_RX_N: C24.2 J1.4 | length 604
  Top Layer w6.71: C24.2 2497.45,7796.84 2490.1,7796.84 2486.17,7800.77 2486.17,7987.75 2517.68,8019.26 2517.68,8261.83 2486.79,8292.71 2486.79,8307.75 2490.72,8311.68 2511.37,8311.68 J1.4
P_ETH2_RX_P: C23.2 J1.3 | length 678.3
  Top Layer w6.71: C23.2@2447,7784 2448,7783 2449,7783 C23.2@2449,7782.66 ; C23.2 C23.2@2449,7782.66 ; J1.3 2511.99,8391.05 2511.99,8363.76 2475.09,8326.86 2475.09,8287.87 2505.97,8256.98 2505.97,8024.11 2474.46,7992.59 2474.46,7800.77 2470.53,7796.84 2463.18,7796.84 C23.2@2449,7782.66
P_ETH2_TX_N: C22.2 J1.2 | length 657.5
  Top Layer w6.71: C22.2 2371.46,7796.84 2364.11,7796.84 2360.18,7800.77 2360.18,7979.76 2405.1,8024.68 2405.1,8334.85 2423.77,8353.52 2429.32,8353.52 2433.25,8349.59 2433.25,8327.69 J1.2 J1.2@2440,8319.06
P_ETH2_TX_P: C21.2 J1.1 | length 687
  Top Layer w6.71: C21.2 2337.2,7796.84 2344.55,7796.84 2348.48,7800.77 2348.48,7984.61 2393.39,8029.52 2393.39,8339.7 2418.92,8365.22 2429.32,8365.22 2433.25,8369.15 2433.25,8391.05 J1.1
  Top Layer w9.35: J1.1@2440.94,8387.31 J1.1
P_ETH3_RX_N: C1.2 J1.10 | length 1882.8
  Top Layer w6.71: C1.2 2497.45,6615.74 2490.1,6615.74 2486.17,6619.67 2486.17,6894.75 2753.68,7162.26 2753.68,7405 2753.68,7533 2753.68,8262.05 2723.01,8292.71 2723.01,8307.75 2726.94,8311.68 2747.59,8311.68 J1.10
P_ETH3_RX_P: C2.2 J1.9 | length 1954.3
  Top Layer w6.71: C2.2 2463.18,6615.74 2470.53,6615.74 2474.46,6619.67 2474.46,6899.59 2741.97,7167.11 2741.97,8257.2 2711.31,8287.87 2711.31,8326.86 2748.21,8363.76 2748.21,8391.05 J1.9
P_ETH3_TX_N: C3.2 J1.8 | length 1903.1
  Top Layer w6.71: C3.2 2371.46,6615.74 2364.11,6615.74 2360.18,6619.67 2360.18,6889.05 2675.84,7204.71 2675.84,8261.14 2644.27,8292.71 2644.27,8307.75 2648.2,8311.68 2668.85,8311.68 J1.8
P_ETH3_TX_P: C4.2 J1.7 | length 1974.6
  Top Layer w6.71: C4.2 2337.2,6615.74 2344.55,6615.74 2348.48,6619.67 2348.48,6893.9 2664.14,7209.56 2664.14,8256.29 2632.57,8287.87 2632.57,8326.86 2669.47,8363.76 2669.47,8391.05 J1.7
P_ETH4_RX_N: C5.2 J1.16 | length 3162.5
  Top Layer w6.71: C5.2 2497.45,5434.64 2490.1,5434.64 2486.17,5438.57 2486.17,5615.75 2990.81,6120.38 2990.81,8261.14 2959.23,8292.71 2959.23,8307.75 2963.16,8311.68 2983.81,8311.68 J1.16
P_ETH4_RX_P: C6.2 J1.15 | length 3234
  Top Layer w6.71: C6.2 2463.18,5434.64 2470.53,5434.64 2474.46,5438.57 2474.46,5620.59 2979.1,6125.23 2979.1,8256.29 2947.53,8287.87 2947.53,8326.86 2984.43,8363.76 2984.43,8391.05 J1.15
P_ETH4_TX_N: C7.2 J1.14 | length 3179.6
  Top Layer w6.71: C7.2 2371.46,5434.64 2364.11,5434.64 2360.18,5438.57 2360.18,5652.76 2909.09,6201.67 2909.09,8264.12 2880.49,8292.71 2880.49,8307.75 2884.42,8311.68 2905.07,8311.68 J1.14
P_ETH4_TX_P: C8.2 J1.13 | length 3251.1
  Top Layer w6.71: C8.2 2337.2,5434.64 2344.55,5434.64 2348.48,5438.57 2348.48,5657.61 2897.38,6206.52 2897.38,8259.27 2868.79,8287.87 2868.79,8326.86 2905.69,8363.76 2905.69,8391.05 J1.13
P_ETH5_RX_N: C9.2 J1.22 | length 4441.1
  Top Layer w6.71: C9.2 2497.45,4253.54 2490.1,4253.54 2486.17,4257.47 2486.17,4402.75 3226.68,5143.26 3226.68,8261.49 3195.45,8292.71 3195.45,8307.75 3199.38,8311.68 3220.03,8311.68 J1.22
P_ETH5_RX_P: C10.2 J1.21 | length 4512.6
  Top Layer w6.71: C10.2 2463.18,4253.54 2470.53,4253.54 2474.46,4257.47 2474.46,4407.59 3214.97,5148.11 3214.97,8256.64 3183.75,8287.87 3183.75,8326.86 3220.65,8363.76 3220.65,8391.05 J1.21
P_ETH5_TX_N: C11.2 J1.20 | length 4461
  Top Layer w6.71: C11.2 2371.46,4253.54 2364.11,4253.54 2360.18,4257.47 2360.18,4455.76 3148.29,5243.86 3148.29,8261.14 3116.71,8292.71 3116.71,8307.75 3120.64,8311.68 3141.29,8311.68 J1.20
P_ETH5_TX_P: C12.2 J1.19 | length 4532.5
  Top Layer w6.71: C12.2 2337.2,4253.54 2344.55,4253.54 2348.48,4257.47 2348.48,4460.61 3136.58,5248.71 3136.58,8256.29 3105.01,8287.87 3105.01,8326.86 3141.91,8363.76 3141.91,8391.05 J1.19
P_ETH6_RX_N: C13.2 J1.28 | length 5720.4
  Top Layer w6.71: C13.2 2497.45,3072.43 2490.1,3072.43 2486.17,3076.36 2486.17,3230.75 3463.25,4207.82 3463.25,8261.14 3431.67,8292.71 3431.67,8307.75 3435.6,8311.68 3456.25,8311.68 J1.28
P_ETH6_RX_P: C14.2 J1.27 | length 5791.9
  Top Layer w6.71: C14.2 2463.18,3072.43 2470.53,3072.43 2474.46,3076.36 2474.46,3235.59 3451.54,4212.67 3451.54,8256.29 3419.97,8287.87 3419.97,8326.86 3456.87,8363.76 3456.87,8391.05 J1.27
P_ETH6_TX_N: C15.2 J1.26 | length 5739.3
  Top Layer w6.71: C15.2 2371.46,3072.43 2364.11,3072.43 2360.18,3076.36 2360.18,3284.76 3383.68,4308.26 3383.68,8261.97 3352.93,8292.71 3352.93,8307.75 3356.86,8311.68 3377.51,8311.68 J1.26
P_ETH6_TX_P: C16.2 J1.25 | length 5810.8
  Top Layer w6.71: C16.2 2337.2,3072.43 2344.55,3072.43 2348.48,3076.36 2348.48,3289.61 3371.97,4313.11 3371.97,8257.12 3341.23,8287.87 3341.23,8326.86 3378.13,8363.76 3378.13,8391.05 J1.25
S_ETH2_RX_N: C24.1 J3.28 | length 677.8
  Top Layer w6.71: J3.28 2409.27,7143.52 2409.27,7165.42 2413.2,7169.34 2423.6,7169.34 2449.13,7194.87 2449.13,7243.75 2415.03,7277.85 2415.03,7315 2415.03,7485.96 2415.03,7500.89 2486.17,7572.04 2486.17,7711.04 2490.1,7714.97 2497.45,7714.97 C24.1
S_ETH2_RX_P: C23.1 J3.27 | length 658.4
  Top Layer w6.71: J3.27 2409.27,7206.87 2409.27,7184.98 2413.2,7181.05 2418.75,7181.05 2437.42,7199.72 2437.42,7238.9 2403.32,7273 2403.32,7505.74 2474.46,7576.88 2474.46,7711.04 2470.53,7714.97 2463.18,7714.97 C23.1
S_ETH2_TX_N: C22.1 J3.26 | length 648.3
  Top Layer w6.71: J3.26 2330.53,7143.52 2330.53,7170.81 2367.43,7207.71 2367.43,7246.7 2338.03,7276.11 2338.03,7618.27 2360.18,7640.42 2360.18,7711.04 2364.11,7714.97 2371.46,7714.97 C22.1
S_ETH2_TX_P: C21.1 J3.25 | length 576.8
  Top Layer w6.71: J3.25 2331.15,7222.88 2351.8,7222.88 2355.73,7226.81 2355.73,7241.85 2326.32,7271.26 2326.32,7437 2326.32,7592 2326.32,7623.11 2348.48,7645.27 2348.48,7711.04 2344.55,7714.97 2337.2,7714.97 C21.1
S_ETH3_RX_N: C1.1 J4.28 | length 676.9
  Top Layer w6.71: J4.28 2409.27,5962.42 2409.27,5984.31 2413.2,5988.24 2423.6,5988.24 2449.13,6013.77 2449.13,6062.65 2416.15,6095.62 2416.15,6264.73 2486.17,6334.75 2486.17,6529.94 2490.1,6533.86 2497.45,6533.86 C1.1
S_ETH3_RX_P: C2.1 J4.27 | length 657.5
  Top Layer w6.71: J4.27 2409.27,6025.77 2409.27,6003.88 2413.2,5999.95 2418.75,5999.95 2437.42,6018.62 2437.42,6057.8 2404.44,6090.77 2404.44,6269.58 2474.46,6339.59 2474.46,6529.94 2470.53,6533.86 2463.18,6533.86 C2.1
S_ETH3_TX_N: C3.1 J4.26 | length 650.1
  Top Layer w6.71: J4.26 2330.53,5962.42 2330.53,5989.7 2367.43,6026.61 2367.43,6065.6 2335.86,6097.17 2335.86,6328.71 2360.18,6353.03 2360.18,6529.94 2364.11,6533.86 2371.46,6533.86 C3.1
S_ETH3_TX_P: C4.1 J4.25 | length 578.6
  Top Layer w6.71: J4.25 2331.15,6041.78 2351.8,6041.78 2355.73,6045.71 2355.73,6060.75 2324.16,6092.32 2324.16,6333.56 2348.48,6357.88 2348.48,6529.94 2344.55,6533.86 2337.2,6533.86 C4.1
S_ETH4_RX_N: C5.1 J5.28 | length 675.2
  Top Layer w6.71: J5.28 2409.27,4781.32 2409.27,4803.21 2413.2,4807.14 2423.6,4807.14 2449.13,4832.67 2449.13,4881.54 2418.12,4912.55 2418.12,5112.35 2486.17,5180.39 2486.17,5348.83 2490.1,5352.76 2497.45,5352.76 C5.1
S_ETH4_RX_P: C6.1 J5.27 | length 655.9
  Top Layer w6.71: J5.27 2409.27,4844.67 2409.27,4822.77 2413.2,4818.85 2418.75,4818.85 2437.42,4837.51 2437.42,4876.69 2406.42,4907.7 2406.42,5117.2 2474.46,5185.24 2474.46,5348.83 2470.53,5352.76 2463.18,5352.76 C6.1
S_ETH4_TX_N: C7.1 J5.26 | length 648.3
  Top Layer w6.71: J5.26 2330.53,4781.32 2330.53,4808.6 2367.43,4845.51 2367.43,4884.5 2338.03,4913.9 2338.03,5249.01 2360.18,5271.17 2360.18,5348.83 2364.11,5352.76 2371.46,5352.76 C7.1
S_ETH4_TX_P: C8.1 J5.25 | length 576.8
  Top Layer w6.71: J5.25 2331.15,4860.68 2351.8,4860.68 2355.73,4864.61 2355.73,4879.65 2326.32,4909.06 2326.32,5253.86 2348.48,5276.02 2348.48,5348.83 2344.55,5352.76 2337.2,5352.76 C8.1
S_ETH5_RX_N: C9.1 J6.28 | length 678.2
  Top Layer w6.71: J6.28 2409.27,3600.21 2409.27,3622.11 2413.2,3626.04 2423.6,3626.04 2449.13,3651.56 2449.13,3700.44 2414.6,3734.97 2414.6,3806.18 2486.17,3877.75 2486.17,4167.73 2490.1,4171.66 2497.45,4171.66 C9.1
S_ETH5_RX_P: C10.1 J6.27 | length 658.8
  Top Layer w6.71: J6.27 2409.27,3663.57 2409.27,3641.67 2413.2,3637.74 2418.75,3637.74 2437.42,3656.41 2437.42,3695.59 2402.9,3730.12 2402.9,3811.03 2474.46,3882.59 2474.46,4167.73 2470.53,4171.66 2463.18,4171.66 C10.1
S_ETH5_TX_N: C11.1 J6.26 | length 649
  Top Layer w6.71: J6.26 2330.53,3600.21 2330.53,3627.5 2367.43,3664.4 2367.43,3703.39 2337.16,3733.66 2337.16,3896.03 2360.18,3919.05 2360.18,4167.73 2364.11,4171.66 2371.46,4171.66 C11.1
S_ETH5_TX_P: C12.1 J6.25 | length 577.5
  Top Layer w6.71: J6.25 2331.15,3679.58 2351.8,3679.58 2355.73,3683.51 2355.73,3698.55 2325.46,3728.82 2325.46,3900.88 2348.48,3923.9 2348.48,4167.73 2344.55,4171.66 2337.2,4171.66 C12.1
S_ETH6_RX_N: C13.1 J7.28 | length 677.7
  Top Layer w6.71: J7.28 2409.27,2419.11 2409.27,2441.01 2413.2,2444.93 2423.6,2444.93 2449.13,2470.46 2449.13,2519.34 2415.12,2553.35 2415.12,2699.99 2486.17,2771.04 2486.17,2986.63 2490.1,2990.56 2497.45,2990.56 C13.1
S_ETH6_RX_P: C14.1 J7.27 | length 658.3
  Top Layer w6.71: J7.27 2409.27,2482.46 2409.27,2460.57 2413.2,2456.64 2418.75,2456.64 2437.42,2475.31 2437.42,2514.49 2403.41,2548.5 2403.41,2704.84 2474.46,2775.88 2474.46,2986.63 2470.53,2990.56 2463.18,2990.56 C14.1
S_ETH6_TX_N: C15.1 J7.26 | length 649.1
  Top Layer w6.71: J7.26 2330.53,2419.11 2330.53,2446.4 2367.43,2483.3 2367.43,2522.29 2337.03,2552.7 2337.03,2783.73 2360.18,2806.89 2360.18,2986.63 2364.11,2990.56 2371.46,2990.56 C15.1
S_ETH6_TX_P: C16.1 J7.25 | length 577.6
  Top Layer w6.71: J7.25 2331.15,2498.47 2351.8,2498.47 2355.73,2502.4 2355.73,2517.44 2325.32,2547.85 2325.32,2788.58 2348.48,2811.74 2348.48,2986.63 2344.55,2990.56 2337.2,2990.56 C16.1
USB1_D_N: J1.37 J7.19 | length 7263.3
  Top Layer w9.35: J7.19 2122.08,2454.7 2122.08,2396.73 2100.96,2375.62 2100.96,2344 2130.96,2314 2529.66,2314 3843.92,3628.26 3843.92,8284.2 3822.81,8305.31 3822.81,8334.69 3850.19,8362.07 3850.19,8390.66 J1.37
USB1_D_P: J1.38 J7.20 | length 7115.8
  Top Layer w9.35: J7.20@2095.93,2411.42 J7.20 2086.61,2338.06 2125.02,2299.65 2535.61,2299.65 3858.27,3622.31 3858.27,3636 J1.38
pads on no net: J1.39 J1.40 J2.34 J3.17 J3.18 J3.19 J3.20 J3.21 J3.22 J4.17 J4.18 J4.19 J4.20 J4.21 J4.22 J5.17 J5.18 J5.19 J5.20 J5.21 J5.22 J6.17 J6.18 J6.19 J6.20 J6.21 J6.22 J7.21 J7.22 J8.21 J8.22 J8.23 J8.24 J8.25 J8.26 J8.27 J8.28 J9.7 J9.8 J9.9 J9.10 J9.11 J9.12 J9.M J9.S J10.M U1.3@3706,8606.44 U1.8@3706,8573.56

## Polygon pours and split planes (outlines as drawn)
GND on Top Layer "GND_L01_P002" (solid, pour order 2): 1007,9147 1007,8881 1024,8864 1155,8864 1178,8887 1178,9084 1114,9148
GND on Int1 (GND) (split plane): 4310.61,413.8 413.8,413.8 413.8,9428.72 4310.61,9428.72
GND on Int2 (PWR) (split plane): 4310.61,413.8 413.8,413.8 413.8,9428.72 4310.61,9428.72

## Silkscreen, mask and mechanical layers (free items; w line width, h text height)
Top Overlay:
  text "MAIN FLIGHT COMPUTER CARD (SLOT 1)" at 1377.95,8070.87 h60
  text "PAYLOAD CARD ONE (SLOT 2)" at 2630,7130 h60
  text "PAYLOAD CARD TWO (SLOT 3)" at 2620,5955 h60
  text "PAYLOAD CARD THREE (SLOT 4)" at 2630,4780 h60
  text "PAYLOAD CARD FOUR (SLOT 5)" at 2635,3600 h60
  text "COMMUNICATIONS CARD FIVE (SLOT 6)" at 1330,2245 h60
  text "BRICKWORKS 2021 / REV 1A 5/16/2021 / MATTHEW GLAZER" at 3239,1503 h60
  text "POWER CARD (SLOT 7)" at 2755.91,836.61 h60
Mechanical 13:
  the board outline again, w5

## Text inside footprints (layer, text, board x,y; h text height)
J1: Top Overlay "40" at 3995.94,8308.74 h20.16; Top Overlay "39" at 3995.94,8388.74 h20.16; Top Overlay "2" at 2370.94,8308.74 h20.16; Top Overlay "1" at 2375.94,8388.74 h20.16
J2: Top Overlay "34" at 2097.4,8305.67 h20.16; Top Overlay "33" at 2097.4,8385.67 h20.16; Top Overlay "2" at 722.4,8305.67 h20.16; Top Overlay "1" at 727.4,8385.67 h20.16
J3: Top Overlay "28" at 2452.95,7124.57 h20.16; Top Overlay "27" at 2452.95,7204.57 h20.16; Top Overlay "2" at 1312.95,7124.57 h20.16; Top Overlay "1" at 1317.95,7204.57 h20.16
J4: Top Overlay "28" at 2452.95,5943.46 h20.16; Top Overlay "27" at 2452.95,6023.46 h20.16; Top Overlay "2" at 1312.95,5943.46 h20.16; Top Overlay "1" at 1317.95,6023.46 h20.16
J5: Top Overlay "28" at 2452.95,4762.36 h20.16; Top Overlay "27" at 2452.95,4842.36 h20.16; Top Overlay "2" at 1312.95,4762.36 h20.16; Top Overlay "1" at 1317.95,4842.36 h20.16
J6: Top Overlay "28" at 2452.95,3581.26 h20.16; Top Overlay "27" at 2452.95,3661.26 h20.16; Top Overlay "2" at 1312.95,3581.26 h20.16; Top Overlay "1" at 1317.95,3661.26 h20.16
J7: Top Overlay "28" at 2452.95,2400.16 h20.16; Top Overlay "27" at 2452.95,2480.16 h20.16; Top Overlay "2" at 1312.95,2400.16 h20.16; Top Overlay "1" at 1317.95,2480.16 h20.16
J8: Top Overlay "28" at 2452.95,825.35 h20.16; Top Overlay "27" at 2452.95,905.35 h20.16; Top Overlay "2" at 1312.95,825.35 h20.16; Top Overlay "1" at 1317.95,905.35 h20.16